# Altium PCB board.PcbDoc
Units mm, origin at the board's own origin, x right, y up, seen from the top; angles counter-clockwise.
Board outline 88.65 x 66.93 mm, 2 copper layers (Top Layer, Bottom Layer); 48 components, 56 nets, 242 pads, 4 vias.
Unrouted connection lines stored in the file: 4.
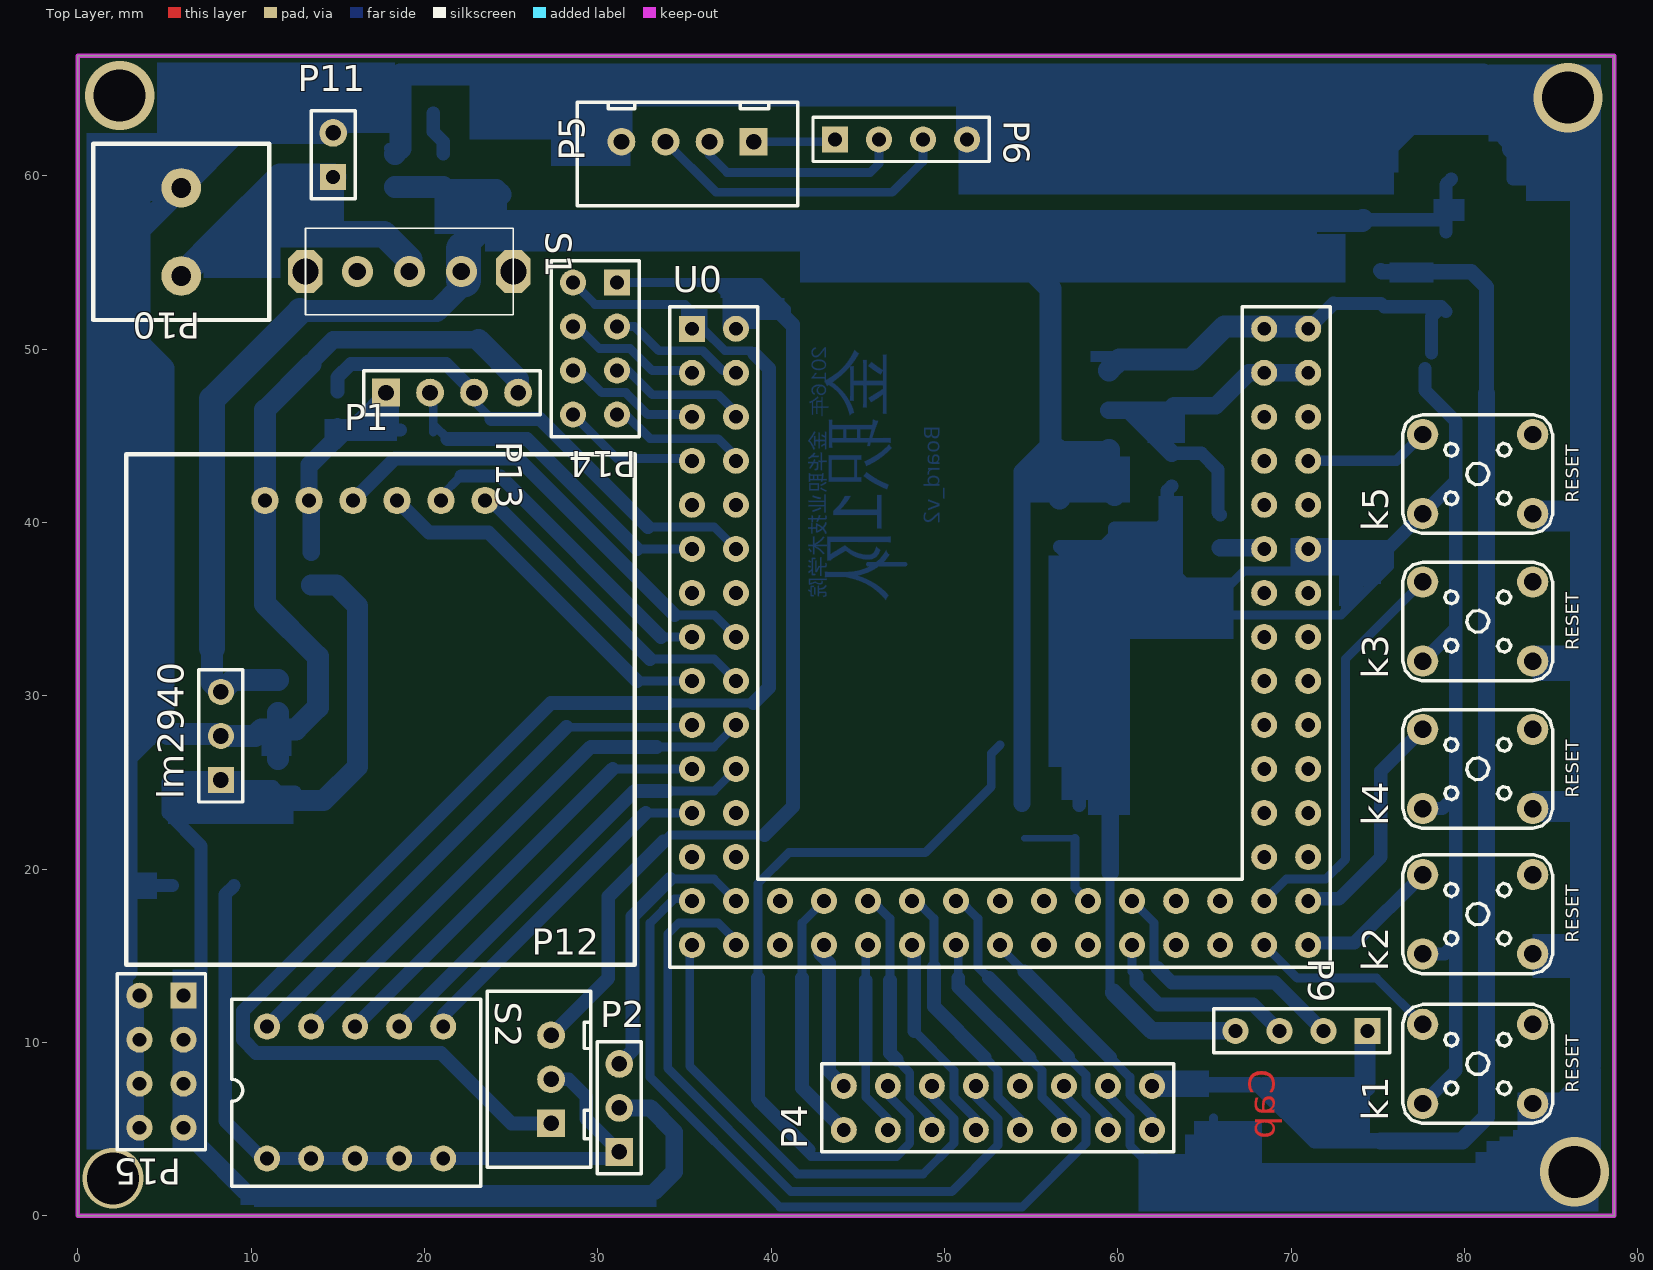
[diagram p0: Top Layer view]
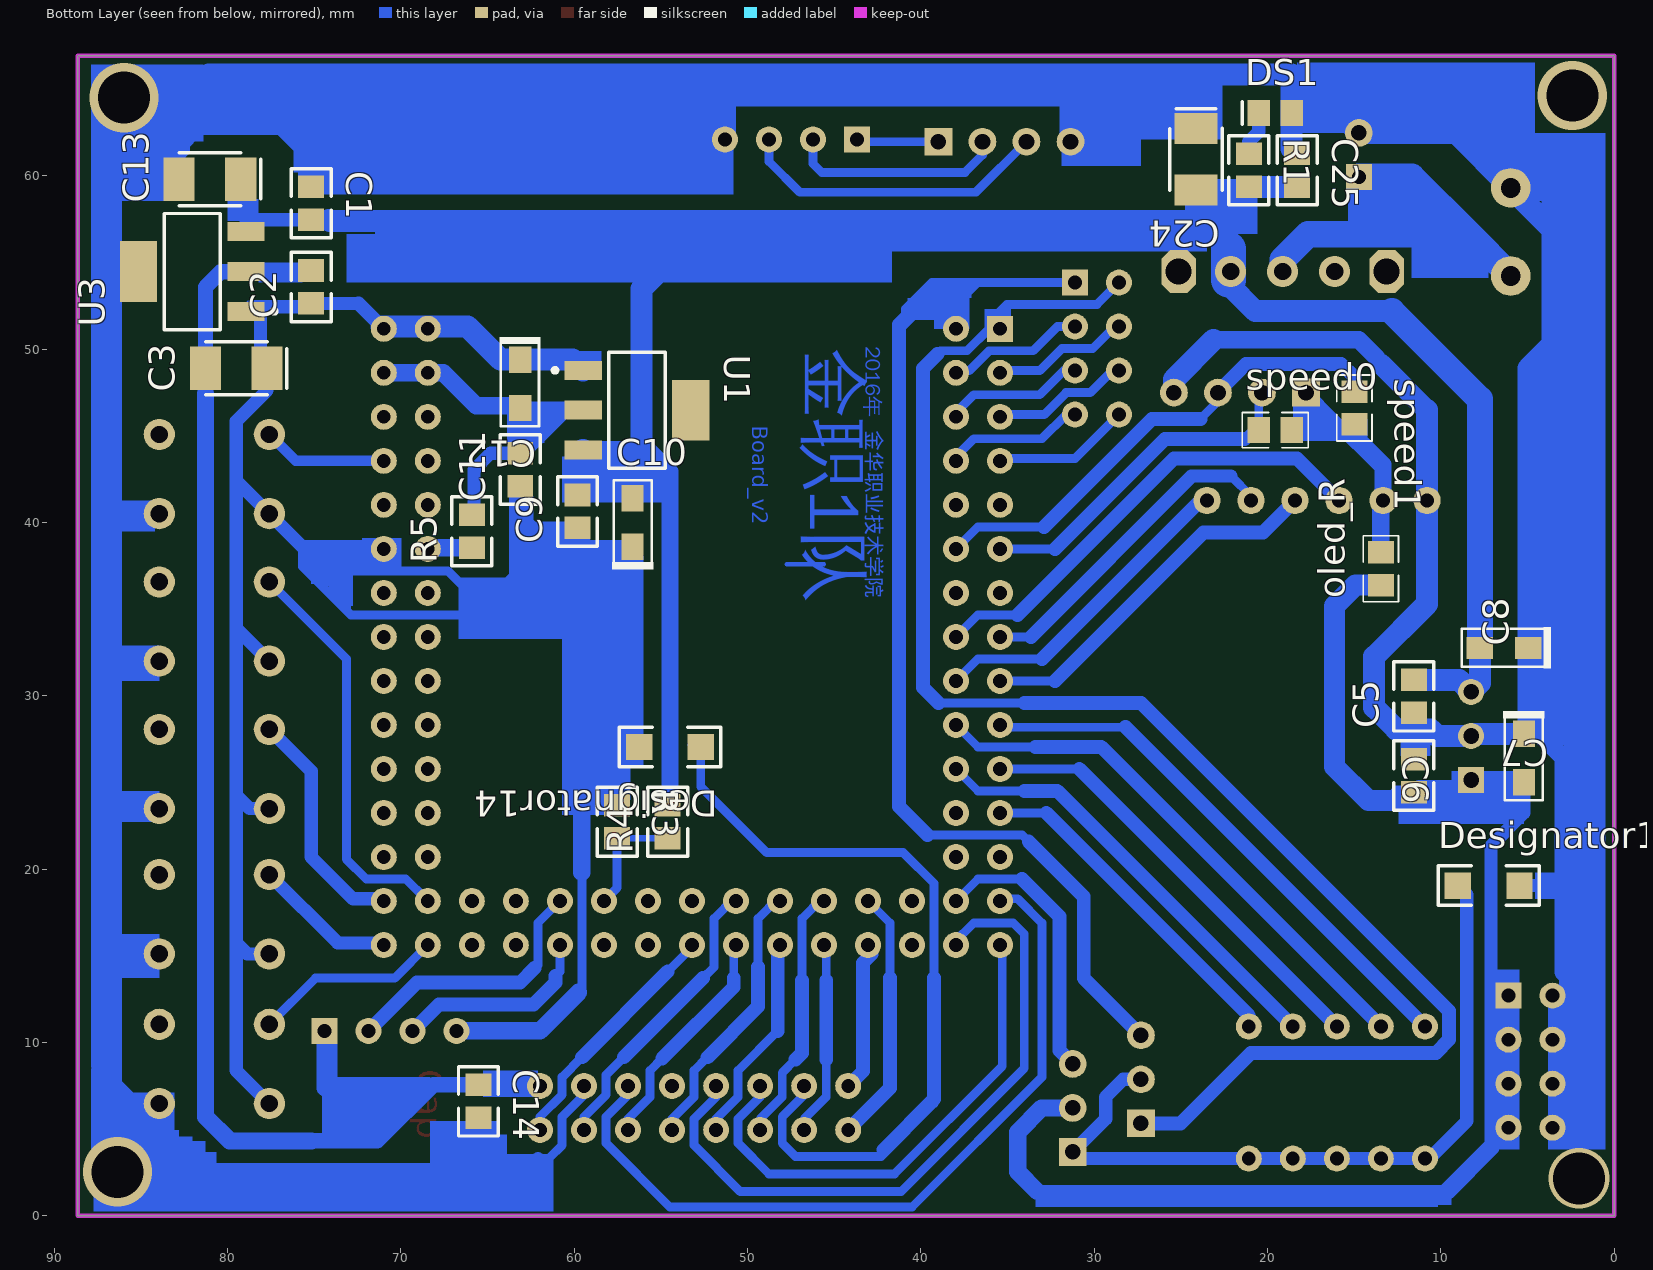
[diagram p1: Bottom Layer view, seen from below]

## Layer stack, top to bottom
Top Layer: signal copper 0.0356
Dielectric: dielectric 0.32, FR-4, Dk 4.8
Bottom Layer: signal copper 0.0356

## Board outline
0,0 0,66.929 88.646,66.929 88.646,0

## Design rules (kind name [scope] priority, off if disabled: settings)
Clearance [All] p1: gap=0.1
MinimumSolderMaskSliver [All] p1 off: minsoldermaskwidth=0.254
PolygonConnect [All] p1: connectstyle=Relief reliefconductorwidth=0.254 reliefentries=4 polygonreliefangle="90 Angle"
RoutingVias [All] p1: holewidth=0.711 width=1.27 viastyle="Through Hole" minholewidth=0.711 minwidth=1.27 maxholewidth=0.711 maxwidth=1.27
SilkToSilkClearance [All] p1 off: silktosilkclearance=0.254
SilkscreenOverComponentPads [All] p1 off: minsilkscreentomaskgap=0.254
SolderMaskExpansion [All] p1: expansion=0.102
Width [All] p1: maxlimit=5.08 minlimit=0.254 preferedwidth=0.508 minimp=50.000000 maximp=50.000000 favimp=50.000000
25 further rules are at their usual default settings.

## Classes and differential pairs
component class board: C1 C2 C3 C5 C6 C7 C8 C9 C10 C11 C12 C14 C24 C25 DS1 k1 k2 k3 k4 k5 P1 P2 P4 P5 P6 P9 P10 P11 P12 P13 P14 P15 R1 R3 R4 R5 S1 S2 U0 U1 U3

## Components (designator, comment, footprint, x,y, rotation, side; value= is the part's Value field where it differs from the comment)
C1 "Cap" R2012-0805 75.184,58.42 r270 bottom
C2 "Cap" R2012-0805 75.184,53.594 r90 bottom
C3 "Cap" CAP-3528 79.502,48.895 r0 bottom
C5 "Cap" R2012-0805 11.557,29.972 r90 bottom
C6 "Cap" R2012-0805 11.557,25.4 r270 bottom
C7 "Cap" CAP-3216 5.207,26.416 r270 bottom
C8 "Cap" CAP-3216 6.35,32.766 r0 bottom
C9 "Cap" R2012-0805 59.817,40.64 r90 bottom
C10 "Cap" CAP-3216 56.642,40.005 r90 bottom
C11 "Cap" R2012-0805 63.119,43.053 r90 bottom
C12 "Cap" CAP-3216 63.119,48.006 r270 bottom
C13 "Cap" CAP-3528 81.026,59.817 r0 bottom (schematic designator C3)
C14 "Cap" R2012-0805 65.532,6.604 r270 bottom
C24 "Cap" CAP-3528 24.13,60.96 r270 bottom
C25 "Cap" R2012-0805 18.288,60.325 r270 bottom
Designator14 "Comment" 1206 54.483,27.051 r0 bottom
Designator16 "Comment" 1206 7.239,19.05 r180 bottom
DS1 "LED2" CC2012-0805 19.558,63.627 r180 bottom
k1 "SWPB1" Reset 83.947,6.477 r180 top
k2 "SWPB1" Reset 83.947,15.113 r180 top
k3 "SWPB1" Reset 83.947,32.004 r180 top
k4 "SWPB1" Reset 83.947,23.495 r180 top
k5 "SWPB1" Reset 83.947,40.513 r180 top
lm2940 "Comment" HDR3X1_A#1 8.255,25.146 r90 top
oled_R "Comment" 0805-1 13.462,37.338 r90 bottom
P1 "Header 6" oled 15.875,41.275 r90 top
P2 "Header 3" HDR3X1_A#2 31.242,3.683 r90 top
P4 "Header 8X2A" HDR8X2_A1 61.976,7.493 r180 top
P5 "Header 4" HDR4X1_B1 38.989,61.976 r180 top
P6 "Header 4" HDR4X1_A#1 43.688,62.103 r0 top
P9 "Header 4" HDR4X1_A#1 74.422,10.668 r180 top
P10 "Header 2" HDR2X1_D1 5.969,56.769 r270 top
P11 "Header 2" HDR2X1_A 14.732,59.944 r90 top
P12 "Header 3" HDR3X1_B1 27.305,5.334 r90 top
P13 "Header 4" HDR4X1_A#2 17.78,47.498 r0 top
P14 "Header4X2" HDR4X1_A#3 31.115,53.848 r270 top
P15 "Header4X2" HDR4X1_A#3 6.096,12.7 r270 top
R1 "Res2" R2012-0805 21.082,60.325 r270 bottom
R3 "Res2" R2012-0805 57.531,22.733 r270 bottom
R4 "Res2" R2012-0805 54.61,22.733 r90 bottom
R5 "Res2" R2012-0805 65.913,39.497 r90 bottom
S1 "SW-SPDT" SWITCH_A2 16.129,54.483 r0 top
S2 "SW DIP-5" DIP10sw 19.812,7.112 r0 top
speed0 "Comment" 0805-1 19.558,45.339 r180 bottom
speed1 "Comment" 0805-1 14.986,46.609 r270 bottom
U0 "K60_MIINI_BOARD" K60_MINI_BOARD 53.213,33.401 r0 top
U1 "LM1117-3.3" DSO-G3 56.388,46.482 r270 bottom
U3 "LM1117-3.3" DSO-G3 82.042,54.483 r90 bottom

## Footprints (in the part's own frame and the unit in brackets; to place one, negate y for a bottom-side part, rotate by r counter-clockwise, add the part's x,y. Pads: shape width x height; smd on the part's side, far side on the other; paste and mask are expansions set on the pad)
0805-1 [mm] "贴?"
  rect 1.3x1.5 smd: 1(-0.95,0) 2(0.95,0)
  silkscreen extent -1.91,-1.02 1.91,1.02, body extent -1.14,-0.51 1.14,0.51, height 1
1206 [mil] "贴?"
  rect 60x60 smd: 1(-70,0) 2(70,0)
  silkscreen extent -115,-45 115,45, body extent -75,-35 75,35, height 39
CAP-3216 [mil] "钽?"
  rect 60x50 smd: 1(-55,0) 2(55,0)
  silkscreen extent -106,-48 96,46
CAP-3528 [mm] "钽?"
  rect 1.8x2.5 smd: 1(-1.778,0) 2(1.778,0)
  silkscreen extent -2.92,-1.52 1.78,1.52, body extent -1.91,-1.4 1.91,1.4, height 1.1
CC2012-0805 [mm]
  rect 1.3x1.5 smd: 1(-0.95,0) 2(0.95,0)
  silkscreen extent -1.9,-0.65 -1.9,0.65
DIP10sw [mm]
  round 1.5 hole 0.8: 1(-8.89,-3.81) 2(-6.35,-3.81) 3(-3.81,-3.81) 4(-1.27,-3.81) 5(1.27,-3.81) 6(1.27,3.81) 7(-1.27,3.81) 8(-3.81,3.81) 9(-6.35,3.81) 10(-8.89,3.81)
  silkscreen extent -10.94,-5.4 3.43,5.39
DSO-G3 [mm]
  rect 1.1x2.15 smd: 1(-2.3,-3.1) 2(0,-3.1) 3(2.3,-3.1)
  rect 3.5x2.15 smd: 4(0,3.1)
  silkscreen extent -3.35,-4.85 3.35,1.62
HDR2X1_A [mm]
  rect 1.5x1.5 hole 0.8: 1(0,0)
  round 1.6 hole 0.9: 2(2.54,0)
  silkscreen extent -1.27,-1.27 3.81,1.27
HDR2X1_D1 [mil]
  round 90 hole 45: 1(-100,0) 2(100,0)
  silkscreen extent -200,-200 200,200
HDR3X1_A#1 [mm] "Connector; Header; 3 Position"
  rect 1.5x1.5 hole 0.9: 1(0,0)
  round 1.5 hole 0.9: 2(2.54,0) 3(5.08,0)
  silkscreen extent -1.27,-1.27 6.35,1.27
HDR3X1_A#2 [mm]
  rect 1.6x1.6 hole 0.9: 1(0,0)
  round 1.6 hole 0.9: 2(2.54,0) 3(5.08,0)
  silkscreen extent -1.27,-1.27 6.35,1.27
HDR3X1_B1 [mm]
  rect 1.6x1.6 hole 0.9: 1(0,0)
  round 1.6 hole 0.9: 2(2.54,0) 3(5.08,0)
  silkscreen extent -2.54,-2.29 7.62,3.68, body extent -2.54,-2.29 7.62,3.68, height 1.5
HDR4X1_A#1 [mm]
  rect 1.5x1.5 hole 0.8: 1(0,0)
  round 1.5 hole 0.8: 2(2.54,0) 3(5.08,0) 4(7.62,0)
  silkscreen extent -1.27,-1.27 8.89,1.27
HDR4X1_A#2 [mm]
  rect 1.6x1.6 hole 0.9: 1(0,0)
  round 1.6 hole 0.9: 2(2.54,0) 3(5.08,0) 4(7.62,0)
  silkscreen extent -1.27,-1.27 8.89,1.27
HDR4X1_A#3 [mm]
  rect 1.5x1.5 hole 0.8: 1(0,0)
  round 1.5 hole 0.8: 2(0,-2.54) 3(2.54,0) 4(2.54,-2.54) 5(5.08,0) 6(5.08,-2.54) 7(7.62,0) 8(7.62,-2.54)
  silkscreen extent -1.27,-3.81 8.89,1.27
HDR4X1_B1 [mm]
  rect 1.6x1.6 hole 0.9: 1(0,0)
  round 1.6 hole 0.9: 2(2.54,0) 3(5.08,0) 4(7.62,0)
  silkscreen extent -2.54,-2.29 10.16,3.68, body extent -2.41,-2.16 10.03,3.56, height 1.5
HDR8X2_A1 [mm]
  round 1.5 hole 0.8: 1(0,0) 2(0,2.54) 3(2.54,0) 4(2.54,2.54) 5(5.08,0) 6(5.08,2.54) 7(7.62,0) 8(7.62,2.54) 9(10.16,0) 10(10.16,2.54) 11(12.7,0) 12(12.7,2.54) 13(15.24,0) 14(15.24,2.54) 15(17.78,0) 16(17.78,2.54)
  silkscreen extent -1.27,-1.27 19.05,3.81
K60_MINI_BOARD [mm]
  rect 1.5x1.5 hole 0.8: 1(-17.78,17.78)
  round 1.5 hole 0.8: 2(-15.24,17.78) 3(-17.78,15.24) 4(-15.24,15.24) 5(-17.78,12.7) 6(-15.24,12.7) 7(-17.78,10.16) 8(-15.24,10.16) 9(-17.78,7.62) 10(-15.24,7.62) 11(-17.78,5.08) 12(-15.24,5.08) 13(-17.78,2.54) 14(-15.24,2.54) 15(-17.78,0) 16(-15.24,0) 17(-17.78,-2.54) 18(-15.24,-2.54) 19(-17.78,-5.08) 20(-15.24,-5.08) 21(-17.78,-7.62) 22(-15.24,-7.62) 23(-17.78,-10.16) 24(-15.24,-10.16) 25(-17.78,-12.7) 26(-15.24,-12.7) 27(-17.78,-15.24) 28(-15.24,-15.24) 29(-17.78,-17.78) 30(-15.24,-17.78) 31(-12.7,-17.78) 32(-12.7,-15.24) 33(-10.16,-17.78) 34(-10.16,-15.24) 35(-7.62,-17.78) 36(-7.62,-15.24) 37(-5.08,-17.78) 38(-5.08,-15.24) 39(-2.54,-17.78) 40(-2.54,-15.24) 41(0,-17.78) 42(0,-15.24) 43(2.54,-17.78) 44(2.54,-15.24) 45(5.08,-17.78) 46(5.08,-15.24) 47(7.62,-17.78) 48(7.62,-15.24) 49(10.16,-17.78) 50(10.16,-15.24) 51(12.7,-17.78) 52(12.7,-15.24) 53(15.24,-17.78) 54(17.78,-17.78) 55(15.24,-15.24) 56(17.78,-15.24) 57(15.24,-12.7) 58(17.78,-12.7) 59(15.24,-10.16) 60(17.78,-10.16) 61(15.24,-7.62) 62(17.78,-7.62) 63(15.24,-5.08) 64(17.78,-5.08) 65(15.24,-2.54) 66(17.78,-2.54) 67(15.24,0) 68(17.78,0) 69(15.24,2.54) 70(17.78,2.54) 71(15.24,5.08) 72(17.78,5.08) 73(15.24,7.62) 74(17.78,7.62) 75(15.24,10.16) 76(17.78,10.16) 77(15.24,12.7) 78(17.78,12.7) 79(15.24,15.24) 80(17.78,15.24) 81(15.24,17.78) 82(17.78,17.78)
  silkscreen extent -19.05,-19.05 19.05,19.05
oled [mil]
  round 62 hole 31.5: 1(0,200) 2(0,100) 3(0,0) 4(0,-100) 5(0,-200) 6(0,-300)
  silkscreen extent -1055,-640 105,515
R2012-0805 [mm]
  rect 1.3x1.5 smd: 1(-0.95,0) 2(0.95,0)
  silkscreen extent -2,-1.15 2,1.15
Reset [mm]
  round 1.8 hole 1: 1(6.35,-4.572) 2(0,-4.572) 3(6.35,0) 4(0,0)
  silkscreen extent -1.14,-5.71 7.49,1.14
SWITCH_A2 [mm]
  round 1.8 hole 1: 1(0,0) 2(3,0) 3(6,0)
  oct 2x2.5 hole 1.5: 4(9,0) 5(-3,0)
  silkscreen extent -3,-2.5 9,2.5

## Part data
C1 C2 C3 C5 C6 C7 C8 C9 C10 C11 C12 C13 C14 C24 C25: "Capacitor"
DS1: "Typical RED, GREEN, YELLOW, AMBER GaAs LED"
k1 k2 k3 k4 k5: library part SW_PUSH2
P1 P2 P5 P6 P9 P10 P11 P12 P13: "接?"
P4 P14 P15: library part He, "接?"
R1 R3 R4 R5: "Resistor"
S1: library part SW-, "开?"
S2: library part "SW DI", "编?"
U1 U3: library part LM1117

## Via types
v1: diameter 4, hole 3, Top Layer to Bottom Layer, 3 vias
v2: diameter 3.5, hole 3, Top Layer to Bottom Layer, 1 vias

## Nets (pads, with @x,y where several pads share a name; then routed paths per layer and width w, separated by ;. In a path a pad name is that pad's centre, name@x,y a point inside that pad or via, vN(x,y) a via of type N, cw(c..) or ccw(c..) an arc to the next point about the centre after c; other vN are vias at no path point)
5V: C6.2 C7.2 lm2940.1 oled_R.1 oled_R.2 P1.2 P2.2 P13.1 P15.1 P15.3 P15.5 P15.7 speed0.2 speed1.2 | length 99.1
  Bottom Layer w0.762: 7.112,3.937 7.112,10.16 7.112,21.336 5.207,23.241 C7.2 5.334,25.146 lm2940.1 8.636,24.765 11.242,24.765 C6.2 12.512,24.45 ; 9.652,1.397 33.274,1.397 ; 13.335,43.053 16.256,45.974 ; 14.795,44.791 14.795,45.468 speed1.2 ; P13.1 16.256,45.974 ; speed0.2 16.891,45.339 16.256,45.974
  Bottom Layer w1: 7.112,3.937 9.652,1.397 ; C6.2@11.657,23.957 12.446,23.957 ; oled_R.2 13.462,41.148 P1.2 13.335,43.053 13.335,43.331 14.795,44.791 ; P2.2 33.02,6.223 34.417,4.826 34.417,2.54 33.274,1.397
  Bottom Layer w1.2: 12.446,23.957 14.178,23.957 16.129,25.908 16.129,35.179 14.92,36.388 oled_R.1
AD5: R3.2 R4.1 U0.46 | length 7
  Bottom Layer w0.381: R4.1 R3.2 ; U0.46@58.42,18.288 U0.46@58.547,18.415
  Bottom Layer w0.508: R3.2 57.531,18.923 U0.46
CAM3.3V: C2.2 C3.2 C14.1 P4.1 P9.1 U3.2 | length 83.2
  Bottom Layer w0.889: P4.1 62.037,7.554 C14.1 68.138,7.554 71.374,4.318 ; P9.1 74.422,7.366 71.374,4.318 ; 75.184,4.318 71.374,4.318 ; C2.2 75.245,54.483 U3.2 80.391,54.483 81.28,53.594 C3.2 81.28,47.445
  Bottom Layer w1: 75.184,4.318 79.883,4.318 81.28,5.715 81.28,47.445
CON: U0.14
CORE3.3V: C11.2 C12.2 R5.2 U0.79 U0.80 U1.2 | length 21.6
  Bottom Layer w0.762: C11.2 64.836,44.003 65.786,43.053 65.786,40.574 R5.2
  Bottom Layer w1.016: U1.2 60.64,46.482 ; C11.2 60.64,46.482 ; U0.80 U0.79 67.564,48.641 65.659,46.736 63.246,46.736 C12.2 62.992,46.482 60.64,46.482
D0: P4.16 U0.34 | length 14.9
  Bottom Layer w0.508: 41.783,13.716 41.783,16.891 U0.34 U0.34@43.18,18.288
  Bottom Layer w0.8: 41.783,13.716 41.783,7.366 P4.16
D1: P4.14 U0.35 | length 11.3
  Bottom Layer w0.508: 45.466,9.017 45.466,6.858 46.736,5.588 P4.14 ; 45.466,13.589 45.466,15.494 U0.35 U0.35@45.632,15.66
  Bottom Layer w0.8: 45.466,9.017 45.466,13.589
D2: P4.12 U0.36 | length 14.8
  Bottom Layer w0.508: U0.36@45.72,18.288 46.863,17.145 46.863,13.589 ; 47.244,9.017 48.006,8.255 48.006,6.858 49.276,5.588 P4.12
  Bottom Layer w0.8: 46.863,13.589 46.863,9.398 47.244,9.017
D3: P4.10 U0.37 | length 12.3
  Bottom Layer w0.508: 48.26,10.668 50.546,8.382 50.546,6.858 51.816,5.588 P4.10
  Bottom Layer w0.8: 48.26,10.668 U0.37@48.26,15.748
D4: P4.8 U0.38 | length 15.9
  Bottom Layer w0.508: U0.38@48.26,18.288 49.403,17.145 49.403,14.351 ; 52.324,9.144 53.086,8.382 53.086,6.858 54.356,5.588 P4.8
  Bottom Layer w0.8: 49.403,14.351 49.403,12.065 52.324,9.144
D5: P4.6 U0.39 | length 13.3
  Bottom Layer w0.508: 50.8,13.716 U0.39@50.8,15.748 ; 54.927,9.08 55.626,8.382 55.626,6.858 56.896,5.588 P4.6
  Bottom Layer w0.8: 50.8,13.716 50.8,13.208 54.927,9.08
D6: P4.4 U0.40 | length 16.9
  Bottom Layer w0.508: U0.40@50.8,18.288 51.943,17.145 51.943,14.351 52.578,13.716 ; 57.15,9.144 58.166,8.128 58.166,6.985 59.436,5.715 P4.4
  Bottom Layer w0.8: 52.578,13.716 57.15,9.144
D7: P4.2 U0.41 | length 14.4
  Bottom Layer w0.508: U0.41@53.34,15.748 53.34,15.367 54.61,14.097 ; 59.563,9.144 60.706,8.001 60.706,6.985 61.976,5.715 P4.2
  Bottom Layer w0.8: 54.61,14.097 59.563,9.144
DUO_JI: P2.3 U0.28 | length 16.2
  Bottom Layer w0.508: 34.163,19.431 36.703,19.431 U0.28
  Bottom Layer w0.8: P2.3 32.004,9.525 32.004,17.272 34.163,19.431
GND: C1.1 C2.1 C3.1 C5.1 C6.1 C7.1 C8.1 C9.1 C10.1 C11.1 C12.1 C13.2 C14.2 C24.1 C25.1 Designator14.1 Designator14.2 Designator16.1 Designator16.2 DS1.2 k1.3 k1.4 k2.3 k2.4 k3.3 k3.4 k4.3 k4.4 k5.3 k5.4 lm2940.2 P1.1 P2.1 P4.3 P4.13 P5.4 P6.4 P9.4 P10.1 P11.2 P12.2 P13.4 P15.2 P15.4 P15.6 P15.8 R3.1 S2.1 S2.2 S2.3 S2.4 S2.5 U0.72 U0.81 U0.82 U1.1 U3.1 U3.4 | length 574.1
  Bottom Layer w0.508: C24.1 24.13,65.471 24.511,65.852 ; 39.243,6.731 39.243,6.477 42.291,3.429 47.244,3.429 48.006,4.191 48.006,5.715 46.736,6.985 P4.13 ; 39.243,13.716 39.243,19.177 41.021,20.955 48.895,20.955 52.705,24.765 52.705,26.67 Designator14.1@53.213,27.178 ; Designator14.2 57.658,27.051 57.785,27.178 59.563,25.4 59.563,23.495 ; P4.3 59.436,6.985 60.706,5.715 60.706,4.064 61.468,3.302 62.103,3.302 64.77,3.302 65.532,4.064 C14.2 ; 59.563,19.812 59.563,13.081 59.753,12.89 ; 62.418,38.039 65.786,34.671 ; 73.025,37.211 67.31,37.211 65.786,35.687 65.786,34.671 ; 75.692,38.608 75.692,37.465 72.898,34.671 65.786,34.671
  Bottom Layer w0.6: C25.1@17.973,61.59 C25.1
  Bottom Layer w0.762: 2.794,19.05 Designator16.2 ; 4.318,27.813 C7.1 ; Designator16.1 8.509,18.542 8.509,5.461 10.668,3.302 S2.1 S2.2 S2.3 S2.4 S2.5 30.861,3.302 P2.1 29.337,5.588 29.337,6.858 28.321,7.874 P12.2 ; 57.404,37.846 C10.1 59.182,38.608 ; R3.1@57.785,23.683 57.785,27.178 57.785,37.211 59.182,38.608 ; 62.103,3.302 62.103,3.175 63.119,2.159 82.169,2.159 83.947,3.937 k1.4 85.344,6.477 87.503,8.636 87.503,58.039 85.725,59.817 C13.2 82.804,61.595 81.661,62.738 76.962,62.738 75.184,60.96 C1.1 ; 62.418,38.039 62.418,39.69 ; C11.1 62.865,41.849 62.865,40.137 62.418,39.69 ; U0.72@71.12,38.608 75.692,38.608 k5.3 79.502,42.418 ; 72.456,52.644 C2.1 75.377,52.451 78.674,52.451 78.105,51.882 C3.1@78.105,49.784 ; k1.3 79.502,8.382 79.502,15.748 ; k2.3 78.867,15.113 79.502,15.748 ; k4.3 78.74,23.495 79.502,24.257 ; k3.3 79.502,33.909 ; C3.1 77.724,47.625 79.502,45.847 79.502,42.418 ; U3.1@78.74,52.385 U3.1 ; 59.182,38.608 59.817,39.243 C9.1 62.418,39.69 ; 79.502,15.748 79.502,24.257 ; 79.502,24.257 79.502,33.909 ; 79.502,33.909 79.502,42.418
  Bottom Layer w0.8: 39.243,13.716 39.243,6.731 42.164,3.81 ; U0.82@71.12,51.308 72.456,52.644
  Bottom Layer w1: 13.716,49.53 14.732,50.546 23.114,50.546 ; 59.563,19.812 59.563,23.495 ; 59.753,12.89 61.976,10.668 P9.4 ; k2.4 86.36,15.113 86.741,15.494 ; k4.4 86.741,23.495 86.995,23.241 ; k3.4 86.614,32.004 86.741,32.131 ; k5.4 86.36,40.513
  Bottom Layer w1.016: 2.794,26.289 4.318,27.813
  Bottom Layer w1.2: 10.795,46.482 13.462,49.149
  Bottom Layer w1.27: 2.794,14.097 2.794,19.05 2.794,26.289 ; 10.795,46.482 P1.1 10.795,35.306 13.843,32.258 13.843,29.337 12.573,28.067 11.557,28.067 ; C6.1 11.557,28.067 ; C5.1 11.557,28.067 ; C25.1 18.608,61.595 DS1.2 ; 23.114,50.546 25.4,48.26 P13.4 ; P5.4 31.369,65.725 31.242,65.852 ; 43.053,65.471 43.434,65.852 ; P6.4 51.308,65.852 ; U1.1 60.109,49.403 C12.1 64.262,49.403 66.167,51.308 U0.82@71.12,51.308 ; 82.804,61.595 82.804,64.135 81.087,65.852 51.308,65.852 ; 11.557,28.067 10.602,28.067 10.221,27.686 lm2940.2 8.128,27.813 C7.1 4.953,28.067 C8.1 4.953,48.895 3.048,50.8 3.048,56.388 P10.1 9.144,62.484 P11.2 16.002,63.754 18.481,63.754 DS1.2 ; DS1.2 18.608,65.852 24.511,65.852 31.242,65.852 ; 31.242,65.852 43.434,65.852 ; 43.434,65.852 51.308,65.852
  other v1: 86.36,2.54 85.979,64.516
  other v2: 2.032,2.159
HREF: P4.7
INH: U0.13
JLINK_VIN: P5.1 P6.1 | length 4.6
  Bottom Layer w0.508: P5.1 P6.1@43.561,61.976
K1: k1.1 U0.53 | length 11
  Bottom Layer w0.508: U0.53 70.358,13.716 74.93,13.716 k1.1
K2: k2.1 U0.54 | length 8.1
  Bottom Layer w0.762: U0.54@71.12,15.748 73.66,15.748 k2.1
K3: k3.1 U0.55 | length 23.4
  Bottom Layer w0.508: U0.55@68.58,18.288 69.723,19.431 72.009,19.431 73.152,20.574 73.152,32.131 k3.1
K4: k4.1 U0.56 | length 13.4
  Bottom Layer w0.762: U0.56@71.12,18.288 72.771,18.288 75.184,20.701 75.184,25.654 k4.1
K5: k5.1 U0.76 | length 7.2
  Bottom Layer w0.6: U0.76 76.073,43.561 k5.1
KEY1: S2.10 U0.19 | length 31.7
  Bottom Layer w0.508: 28.194,28.194 35.306,28.194 U0.19
  Bottom Layer w0.8: S2.10 28.194,28.194
KEY2: S2.9 U0.20 | length 31.7
  Bottom Layer w0.508: 33.401,27.051 36.703,27.051 U0.20
  Bottom Layer w0.8: S2.9 29.591,27.051 33.401,27.051
KEY3: S2.8 U0.21 | length 25.6
  Bottom Layer w0.508: 30.861,25.781 U0.21
  Bottom Layer w0.8: S2.8 30.861,25.781
KEY4: S2.7 U0.22 | length 25.6
  Bottom Layer w0.508: 34.036,24.511 36.703,24.511 U0.22
  Bottom Layer w0.8: S2.7 32.131,24.511 34.036,24.511
KEY5: S2.6 U0.23 | length 19.8
  Bottom Layer w0.508: S2.6 S2.6@21.082,11.557 ; 32.766,23.241 U0.23
  Bottom Layer w0.8: S2.6@21.082,11.557 32.766,23.241
NetDS1_1: DS1.1 R1.1 | length 2.6
  Bottom Layer w0.762: DS1.1 20.508,62.55 21.082,61.976 R1.1
NetP10_2: P10.2 P11.1 S1.2 | length 23.2
  Bottom Layer w1.524: P10.2 8.382,56.642 ; P11.1 11.684,59.944 8.382,56.642 ; S1.2 19.129,55.166 17.653,56.642 8.382,56.642
NetR5_1: R5.1 U0.71 | length 2.7
  Bottom Layer w0.762: U0.71@68.519,38.547 U0.71@68.58,38.608
  Bottom Layer w1: R5.1 U0.71@68.519,38.547
OLED_D0: P1.3 U0.16 | length 27.4
  Bottom Layer w0.508: 34.417,34.671 36.703,34.671 U0.16
  Bottom Layer w0.8: P1.3 18.288,43.688 25.4,43.688 34.417,34.671
OLED_D1: P1.4 U0.17 | length 21.3
  Bottom Layer w0.508: 32.258,30.861 U0.17
  Bottom Layer w0.8: P1.4 20.256,39.433 23.685,39.433 32.258,30.861
OLED_DC: P1.6 U0.18 | length 18.8
  Bottom Layer w0.508: 33.02,32.131 36.703,32.131 U0.18
  Bottom Layer w0.8: P1.6 23.876,41.275 33.02,32.131
OLED_RES: P1.5 U0.15 | length 19
  Bottom Layer w0.508: P1.5 20.955,41.529 22.098,42.672 ; 33.655,33.401 U0.15
  Bottom Layer w0.75: 22.098,42.672 24.384,42.672
  Bottom Layer w0.8: 24.384,42.672 33.655,33.401
PCLK_OUT: P4.15 U0.33 | length 8.2
  Bottom Layer w0.8: U0.33@42.856,15.093 43.349,14.599 43.349,8.34 P4.15
PTB22: P14.8 U0.7 | length 8
  Bottom Layer w0.508: P14.8 31.115,43.688 U0.7@35.56,43.688
PTB23: P14.7 U0.8 | length 8
  Bottom Layer w0.508: P14.7 31.623,46.228 33.02,44.831 36.957,44.831 U0.8@38.1,43.688
PTC0: 
PTC1: 
PTC2: P14.3 U0.4 | length 8
  Bottom Layer w0.508: P14.3 32.131,51.308 33.528,49.911 36.068,49.911 37.211,48.768 U0.4@38.1,48.768
PTC3: P14.4 U0.3 | length 8
  Bottom Layer w0.508: P14.4 28.829,51.308 30.099,50.038 31.877,50.038 33.147,48.768 U0.3@35.56,48.768
PTC4: P14.6 U0.5 | length 8
  Bottom Layer w0.508: P14.6 28.956,48.768 30.226,47.498 31.623,47.498 32.893,46.228 U0.5@35.56,46.228
PTC5: P14.5 U0.6 | length 8
  Bottom Layer w0.508: P14.5 31.75,48.768 33.147,47.371 36.957,47.371 U0.6@38.1,46.228
PWM1: P12.3 P14.1 U0.2 | length 66.1
  Bottom Layer w0.508: P14.1 36.703,53.848 ; 33.782,21.59 34.163,21.971 39.624,21.971 ; U0.2 37.973,52.578 36.703,53.848 ; 40.894,51.816 40.894,52.324 39.37,53.848 36.703,53.848
  Bottom Layer w0.8: P12.3 30.607,13.716 30.607,18.415 33.782,21.59 ; 39.624,21.971 41.275,23.622 41.275,51.308 ; 40.259,52.324 41.275,51.308 ; 40.894,51.816 41.275,51.435 41.275,51.308
PWM2: P12.1 P14.2 U0.1 | length 91.9
  Bottom Layer w0.508: P14.2 29.845,52.578 35.052,52.578 35.433,52.197 U0.1 36.068,51.181 37.338,49.911 38.862,49.911 39.052,49.721 ; 34.036,29.591 38.989,29.591
  Bottom Layer w0.8: P12.1 25.019,5.334 20.955,9.398 10.287,9.398 9.525,10.16 9.525,11.811 27.305,29.591 34.036,29.591 ; 38.989,29.591 39.878,30.48 39.878,48.895 39.052,49.721
RX: P9.2 U0.48 | length 15.6
  Bottom Layer w0.508: U0.48 62.103,16.891 62.103,14.478 62.293,14.287
  Bottom Layer w0.8: 62.293,14.287 63.119,13.462 69.088,13.462 P9.2
SCL: P4.11 U0.29 | length 29.6
  Bottom Layer w0.508: U0.29@35.56,15.748 35.306,15.494 35.306,8.636 41.529,2.413 48.768,2.413 50.546,4.191 50.546,5.588 49.276,6.858 P4.11
SDA: P4.9 U0.30 | length 39.6
  Bottom Layer w0.508: U0.30@38.1,15.748 36.957,16.891 34.671,16.891 34.036,16.256 34.036,8.509 41.148,1.397 50.419,1.397 53.086,4.064 53.086,5.588 51.816,6.858 P4.9
SPEED_0: P13.3 speed1.1 U0.12 | length 28.9
  Bottom Layer w0.508: P13.3@22.892,47.498 P13.3 22.86,46.99 23.876,45.974 ; 32.893,39.751 36.703,39.751 U0.12
  Bottom Layer w0.8: speed1.1 14.986,48.387 15.748,49.149 21.241,49.149 22.892,47.498 P13.3@22.898,47.492 ; 23.876,45.974 26.67,45.974 32.893,39.751
SPEED_1: P13.2 speed0.1 U0.11 | length 20.3
  Bottom Layer w0.508: P13.2 20.508,47.31 speed0.1@20.508,45.212 ; speed0.1@20.508,45.659 21.336,44.831 ; 32.258,38.481 U0.11
  Bottom Layer w0.8: 21.336,44.831 25.908,44.831 32.258,38.481
SWCLK: P5.3 P6.3 | length 18.1
  Bottom Layer w0.508: P5.3 36.83,59.055 46.99,59.055 48.768,60.833 P6.3
SWDIO: P5.2 P6.2 | length 12.6
  Bottom Layer w0.508: P5.2 36.449,61.214 37.465,60.198 45.72,60.198 46.228,60.706 P6.2
TX: P9.3 U0.47 | length 11.7
  Bottom Layer w0.508: U0.47 60.833,14.097 61.087,13.843
  Bottom Layer w0.8: 61.087,13.843 61.087,13.462 62.357,12.192 67.818,12.192 P9.3
VIN: C1.2 C5.2 C8.2 C9.2 C10.2 C13.1 C24.2 C25.2 lm2940.3 R1.2 R4.2 S1.3 S1.4 U1.3 U3.3 | length 153.3
  Bottom Layer w0.508: R4.2@54.483,23.81 R4.2 ; 55.944,44.386 56.134,44.577
  Bottom Layer w0.762: 74.168,57.47 C1.2 78.942,57.47 ; U3.3 78.942,57.47 ; C13.1 78.942,59.511 78.942,57.47
  Bottom Layer w1: R4.2@54.483,23.81 54.483,42.926 55.944,44.386
  Bottom Layer w1.27: C8.2 7.747,30.734 lm2940.3 8.951,30.922 C5.2 ; 12.827,52.197 20.701,52.197 22.256,53.752 S1.3@22.256,53.975 ; C25.2 R1.2 21.275,59.182 C24.2 ; 22.256,55.784 24.13,57.658 C24.2 ; 24.384,57.404 52.197,57.404 ; C24.2@24.384,58.928 C24.2 ; C10.2 56.642,44.069 ; C9.2 59.488,41.919 U1.3 59.375,44.069 56.642,44.069 ; 74.168,57.47 74.102,57.404 52.197,57.404 ; 52.197,57.404 56.134,53.467 56.134,44.577 56.642,44.069
  Bottom Layer w1.5: C8.2 7.747,47.117 12.827,52.197
  Bottom Layer w2: S1.3@22.256,53.975 22.256,55.784
VSYNC: P4.5 U0.27 | length 45.6
  Bottom Layer w0.508: U0.27@35.56,18.288 34.417,18.288 33.02,16.891 33.02,8.001 40.513,0.508 54.483,0.508 58.166,4.191 58.166,5.715 56.896,6.985 P4.5
pads on no net: k1.2 k2.2 k3.2 k4.2 k5.2 S1.1 S1.5 U0.9 U0.10 U0.24 U0.25 U0.26 U0.31 U0.32 U0.42 U0.43 U0.44 U0.45 U0.49 U0.50 U0.51 U0.52 U0.57 U0.58 U0.59 U0.60 U0.61 U0.62 U0.63 U0.64 U0.65 U0.66 U0.67 U0.68 U0.69 U0.70 U0.73 U0.74 U0.75 U0.77 U0.78 U1.4
copper on no net: | length 2.2
  Bottom Layer w0.254: 45.593,37.592 47.752,37.592
  other v1: 2.413,64.643

## Keep-outs
Keep-Out Layer:
  the board outline again, w0.254

## Other copper
Bottom Layer:
  rectangle net GND: 10.602,26.543 12.319,28.067
  rectangle net GND: 1.016,29.337 4.953,49.403
  rectangle net 5V: 14.224,44.704 18.415,45.974
  rectangle net 5V: 16.383,45.466 17.526,46.355
  rectangle net 5V: 16.891,44.958 18.542,46.863
  rectangle net 5V: 5.207,24.892 9.398,25.654
  rectangle net GND: 83.312,0.254 83.947,2.54
  rectangle net GND: 82.804,4.445 83.058,4.953
  rectangle net GND: 81.28,3.429 82.042,4.318
  rectangle net GND: 82.042,3.556 83.312,4.572
  rectangle net GND: 80.645,2.54 83.185,3.683
  rectangle net PWM2: 34.798,50.673 36.322,52.324
  rectangle net PWM1: 37.211,51.181 39.243,52.578
  rectangle net PWM1: 39.37,52.705 40.132,53.213
  rectangle net PWM1: 37.846,51.689 40.767,52.959
  rectangle net PWM1: 37.084,52.959 39.751,53.721
  rectangle net GND: 71.501,37.465 73.025,38.608
  rectangle net GND: 65.405,33.274 66.675,36.83
  rectangle net GND: 27.305,60.579 31.877,62.611
  rectangle net CAM3.3V: 72.263,4.445 74.549,7.239
  rectangle net CAM3.3V: 68.326,7.747 74.168,8.001
  rectangle net CAM3.3V: 70.739,4.826 71.755,5.334
  rectangle net CAM3.3V: 70.485,5.334 72.771,5.969
  rectangle net CAM3.3V: 70.485,5.08 72.136,5.588
  rectangle net CAM3.3V: 70.104,5.715 72.771,6.096
  rectangle net CAM3.3V: 69.596,6.096 73.025,6.477
  rectangle net CAM3.3V: 69.215,6.477 73.66,6.985
  rectangle net CAM3.3V: 68.453,6.985 74.676,7.874
  rectangle net VIN: 54.737,54.229 71.501,55.88
  rectangle net VIN: 53.213,55.626 71.501,57.023
  rectangle net NetP10_2: 7.239,54.102 11.684,56.134
  rectangle net VIN: 20.574,56.642 24.765,59.182
  rectangle net NetP10_2: 10.16,57.404 15.367,59.436
  rectangle net GND: 3.937,27.813 4.318,48.895
  rectangle net GND: 3.81,59.182 5.461,62.484
  rectangle net GND: 62.738,34.798 65.405,36.83
  rectangle net GND: 63.246,34.798 63.5,36.957
  rectangle net GND: 63.246,33.274 65.405,34.798
  rectangle net GND: 62.418,39.37 62.865,39.69
  rectangle net GND: 62.865,39.37 63.246,39.878
  rectangle net GND: 59.69,33.274 63.246,39.37
  rectangle net GND: 22.606,62.103 31.496,65.278
  rectangle net GND: 72.771,35.179 73.152,35.306
  rectangle net GND: 72.898,35.052 73.152,35.179
  rectangle net GND: 73.914,36.322 74.549,36.576
  rectangle net GND: 73.533,35.687 73.914,36.322
  rectangle net GND: 72.771,35.306 73.66,35.941
  rectangle net GND: 72.771,35.941 74.168,36.449
  rectangle net GND: 72.771,36.449 75.184,36.957
  rectangle net GND: 72.771,36.957 75.311,37.211
  rectangle net GND: 72.771,37.211 75.692,38.608
  rectangle net GND: 75.819,62.484 76.454,63.373
  rectangle net GND: 82.804,59.69 83.947,63.754
  rectangle net GND: 68.199,1.778 82.931,3.048
  rectangle net GND: 64.389,2.159 68.326,5.461
  rectangle net GND: 87.249,7.493 87.757,8.89
  rectangle net GND: 86.106,7.112 87.757,7.493
  rectangle net GND: 83.058,2.54 83.947,4.953
  rectangle net GND: 83.058,4.953 87.757,7.112
  rectangle net GND: 61.214,0.254 83.566,0.889
  rectangle net GND: 61.214,0.889 61.722,2.032
  rectangle net GND: 62.611,1.778 64.389,3.302
  rectangle net GND: 63.881,1.778 66.802,4.699
  rectangle net GND: 61.214,2.032 62.484,3.302
  rectangle net GND: 61.468,0.762 83.439,2.667
  rectangle net GND: 86.106,7.493 87.376,58.674
  rectangle net GND: 83.566,58.547 87.63,62.23
  rectangle net GND: 56.007,25.908 58.801,38.1
  rectangle net GND: 59.055,37.719 59.944,38.735
  rectangle net GND: 59.69,38.227 60.706,38.735
  rectangle net GND: 57.912,37.084 60.706,38.227
  rectangle net GND: 57.785,24.511 60.706,37.084
  rectangle net GND: 57.023,37.719 58.293,38.608
  rectangle net 5V: 5.207,22.606 12.446,24.765
  rectangle net GND: 0.508,3.81 3.175,26.289
  rectangle net GND: 0.508,26.289 2.921,27.178
  rectangle net GND: 0.508,27.178 4.445,29.083
  rectangle net GND: 4.064,58.547 5.334,59.817
  rectangle net GND: 0.508,29.083 4.191,62.484
  rectangle net GND: 6.223,60.579 6.985,61.468
  rectangle net GND: 6.096,60.96 7.366,61.722
  rectangle net GND: 6.604,61.214 8.255,62.484
  rectangle net GND: 4.572,59.309 6.604,62.484
  rectangle net GND: 4.572,62.484 18.288,66.548
  rectangle net GND: 50.8,58.928 54.102,64.389
  rectangle net GND: 54.102,58.928 75.946,60.452
  rectangle net GND: 54.102,60.198 76.2,62.738
  rectangle net GND: 54.102,62.738 83.058,64.643
  rectangle net GND: 31.75,64.008 82.296,65.659
  rectangle net GND: 3.175,3.81 3.81,13.335
  rectangle net 5V: 5.461,3.81 7.239,14.224
  rectangle net VIN: 23.495,55.626 53.213,57.277
  rectangle net GND: 69.977,37.211 72.263,39.116
  rectangle net PWM1: 37.211,52.197 38.354,53.34
  rectangle net GND: 57.531,24.003 59.563,24.638
  rectangle net GND: 56.769,24.003 57.785,26.162
  rectangle net GND: 58.293,23.114 60.706,24.511
  rectangle net GND: 58.42,49.276 59.944,49.911
  rectangle net CAM3.3V: 62.103,6.858 65.278,8.382
  rectangle net GND: 62.357,36.703 63.754,41.529
  rectangle net CORE3.3V: 61.722,44.577 63.881,46.482
  rectangle net VIN: 55.245,41.148 60.706,43.815
  rectangle net VIN: 54.483,41.148 56.515,43.18
  rectangle net VIN: 41.656,53.848 73.152,56.642
  rectangle net GND: 83.947,13.716 86.995,16.256
  rectangle net GND: 83.947,22.733 86.487,24.511
  rectangle net GND: 83.947,30.861 86.741,32.893
  rectangle net GND: 84.201,39.497 86.868,41.275
  rectangle net CAM3.3V: 73.66,7.874 74.422,9.906
  rectangle net CAM3.3V: 75.692,53.848 78.232,54.991
  rectangle net VIN: 78.232,57.404 80.01,58.674
  rectangle net GND: 2.286,18.288 4.572,19.812
  rectangle net 5V: 10.16,0.508 33.401,1.524
  rectangle net 5V: 9.398,0.635 11.049,1.397
  rectangle net GND: 81.407,61.976 87.503,66.421
  rectangle net GND: 87.503,56.007 87.884,66.421
  rectangle net GND: 83.566,0.254 87.757,4.953
  rectangle net GND: 87.249,1.778 87.884,8.509
  text "2016年" at 43.499,50.165 h1.52 r90
  text "金职1队" at 47.371,50.038 h5.08 r90
  text "Board_v2" at 50.038,45.593 h1.52 r90
  text "金华职业技术学院" at 43.434,45.339 h1.52 r90

## Text inside footprints (layer, text, board x,y; h text height)
k1: Top Overlay "RESET" at 86.614,7.112 h0.76 r90
k2: Top Overlay "RESET" at 86.614,15.748 h0.76 r90
k3: Top Overlay "RESET" at 86.614,32.639 h0.76 r90
k4: Top Overlay "RESET" at 86.614,24.13 h0.76 r90
k5: Top Overlay "RESET" at 86.614,41.148 h0.76 r90